# EAGLE board schematic (EAGLE 6.5.0)

Size 93 x 70 mm. Coordinates in mm from the lower left corner, seen from the top.
Outline: 0,63.65 0,6.35 arc90 6.35,0 86.65,0 arc90 93,6.35 93,63.65 arc90 86.65,70 6.35,70 arc90 0,63.65
Copper layers (1*16): Top 0.035mm / dielectric 1.5mm / Bottom 0.035mm
Design rules "default": minimum track width 10mil, minimum drill 24mil, track to track 8mil, track to pad 8mil, pad to pad 8mil, via to via 8mil, smd to smd 8mil, copper to edge 40mil, drill to drill 8mil, minimum pad ring 10mil, minimum via ring 8mil, stop-mask expansion 4mil, vias tented up to drill 0mil, thermal gap 10mil
Net classes: 0 default: width 0.152 mm, drill 0.305 mm, clearance 0.152 mm; 1 power: width 0.152 mm, drill 0.305 mm, clearance 0.152 mm; 2 gnd: width 0.152 mm, drill 0.305 mm, clearance 0.152 mm
Holes 3 mm at 4,12.6 89,12.6
Holes 5.5 mm at 89.25,58 3.75,58

## Footprints (pad centres in the part's own frame; a part is rotated, then mirrored left to right if it is on the bottom)
LIGHT-PIPE = hole 1.3: 1.214,-0.9; -1.286,-0.9
DBS = smd 1.7 x 1.9: + -2.55,-4.5; - 2.55,-4.5; AC1 -2.55,4.5; AC2 2.55,4.5
C0805 = smd 1.3 x 1.5: 1 -0.95,0; 2 0.95,0
E3,5-10 = drill 0.813 pad 1.6: + -1.778,0 | drill 0.813 pad 1.6 octagon: - 1.778,0
E5-10,5 = drill 1.016 pad 2.54: + -2.54,0 | drill 1.016 pad 2.54 octagon: - 2.54,0
0402-CAP = smd 0.7 x 0.9: 1 -0.65,0; 2 0.65,0
C0402 = smd 0.7 x 0.9: 1 -0.65,0; 2 0.65,0
E2,5-6E = drill 0.813 pad 1.778: + -1.27,0 | drill 0.813 pad 1.778 octagon: - 1.27,0
E2-5 = drill 0.813 pad 1.422: + -1.016,0 | drill 0.813 pad 1.422 octagon: - 1.016,0
E5-13 = drill 1.016 pad 2.54: + -2.54,0 | drill 1.016 pad 2.54 octagon: - 2.54,0
C0603 = smd 1 x 1.1: 1 -0.85,0; 2 0.85,0
DCJACK_2MM_PTH = drill 2.8: GND 0,7.35; GNDBREAK 4.8,10.75 | drill 3.2: PWR 0,13.6
SMC = smd 2.8 x 3.8: A 3.7,0; C -3.7,0
SMA-DIODE = smd 1.27 x 1.47: A -2.15,0; C 2.15,0
DUOLED-C-0603 = smd 0.9 x 0.4: A1 -0.825,0.43; A2 -0.825,-0.43; C1 0.825,0.43; C2 0.825,-0.43
2X08 = drill 1.016 octagon: 1 -8.89,-1.27; 2 -8.89,1.27; 3 -6.35,-1.27; 4 -6.35,1.27; 5 -3.81,-1.27; 6 -3.81,1.27; 7 -1.27,-1.27; 8 -1.27,1.27; 9 1.27,-1.27; 10 1.27,1.27; 11 3.81,-1.27; 12 3.81,1.27; 13 6.35,-1.27; 14 6.35,1.27; 15 8.89,-1.27; 16 8.89,1.27
1X04 = drill 1.016 long: 1 -3.81,0; 2 -1.27,0; 3 1.27,0; 4 3.81,0
2X06 = drill 1.016 octagon: 1 -6.35,-1.27; 2 -6.35,1.27; 3 -3.81,-1.27; 4 -3.81,1.27; 5 -1.27,-1.27; 6 -1.27,1.27; 7 1.27,-1.27; 8 1.27,1.27; 9 3.81,-1.27; 10 3.81,1.27; 11 6.35,-1.27; 12 6.35,1.27
USB-MICROB = smd 0.35 x 1.4: D+ 0,2.65; D- -0.65,2.65; GND 1.3,2.65; ID 0.65,2.65; VBUS -1.3,2.65 | smd 1.8 x 1.9: MT1 -4,0; MT2 4,0 | smd 1.9 x 1.9: P$1 -1.27,0; P$2 1.27,0
SOT223-5 = smd 0.4 x 1.8: 1 -2.54,-3; 2 -1.27,-3; 3 0,-3; 4 1.27,-3; 5 2.54,-3 | drill 0.305: GND@1 -1.8,3.9; GND@2 -0.9,3.9; GND@3 0,3.9; GND@4 0.9,3.9; GND@5 1.8,3.9; GND@6 -1.8,3; GND@7 -0.9,3; GND@8 0,3; GND@9 0.9,3; GND@10 1.8,3; GND@11 -1.8,2.1; GND@12 -0.9,2.1; GND@13 0,2.1; GND@14 0.9,2.1; GND@15 1.8,2.1 | smd 3.81 x 1.8: TAB 0,3
0402-RES = smd 0.7 x 0.9: 1 -0.65,0; 2 0.65,0
R0603 = smd 1 x 1.1: 1 -0.85,0; 2 0.85,0
R2512 = smd 1.8 x 3.2: 1 -2.8,0; 2 2.8,0
R0402 = smd 0.7 x 0.9: 1 -0.65,0; 2 0.65,0
B3F-31XX = drill 1.016 octagon: 1 -2.261,-1.245; 2 2.261,-1.245 | drill 1.499 pad 2.159: 3 -3.505,1.245; 4 3.505,1.245
B3F-10XX = drill 1.016 long: 1 -3.251,2.261; 2 3.251,2.261; 3 -3.251,-2.261; 4 3.251,-2.261
MAGJACK-POE = drill 0.89: 1 5.72,-8.89; 2 4.45,-6.35; 3 3.18,-8.89; 4 1.91,-6.35; 5 0.64,-8.89; 6 -0.63,-6.35; 7 -1.9,-8.89; 8 -3.17,-6.35; 9 -4.44,-8.89; 10 -5.71,-6.35 | drill 1.02: 11 6.625,4.08; 12 4.085,4.08; 13 -4.085,4.08; 14 -6.625,4.08 | drill 1.63: GND0 -7.745,-3.17; GND1 7.745,-3.17 | hole 3.25: -5.715,-0.12; 5.715,-0.12
PUSBMXX4-TL = smd 0.5 x 0.2: P$1 -0.75,0.5; P$2 -0.75,0; P$3 -0.75,-0.5; P$4 0.75,-0.5; P$5 0.75,0; P$6 0.75,0.5 | smd 0.4 x 1.1: P$7 0,0
SI3402 = smd 1 x 0.25: 1 -2.35,1.2; 2 -2.35,0.4; 3 -2.35,-0.4; 4 -2.35,-1.2; 11 2.35,-1.2; 12 2.35,-0.4; 13 2.35,0.4; 14 2.35,1.2 | smd 0.25 x 1: 5 -2,-2.35; 6 -1.2,-2.35; 7 -0.4,-2.35; 8 0.4,-2.35; 9 1.2,-2.35; 10 2,-2.35; 15 2,2.35; 16 1.2,2.35; 17 0.4,2.35; 18 -0.4,2.35; 19 -1.2,2.35; 20 -2,2.35 | smd 2.7 x 2.7: PAD 0,0
8PIN-SOP-8L-EP = smd 1.27 x 0.42: P$1 -3.048,1.778; P$2 -3.048,0.508; P$3 -3.048,-0.762; P$4 -3.048,-2.032; P$5 2.952,-2.032; P$6 2.952,-0.762; P$7 2.952,0.508; P$8 2.952,1.778
6-WDFN-EXPOSED-PAD = smd 0.42 x 0.42: A 0.65,0.915; C@2 0.65,-0.915; D@1 -0.65,0.915; G 0,-0.915; NC 0,0.915; S -0.65,-0.915 | smd 0.8 x 1: C@1 0.5,0; D@2 -0.5,0
SRN6045 = smd 2.5 x 6: 1 -2.175,-0.175; 2 2.125,-0.175
FIDUCIAL_1MM = smd 1 x 1: 1 0,0
SOL-PAD-OPEN = smd 2 x 2: P$1 0,0; P$2 2.31,0
INDUCTOR-10X9.8X6 = smd 3.5 x 10.2: P$1 -3.3,0; P$2 3.3,0
SKW71-SMT = smd 0.65 x 2.115: 1 0,0; 2 0,3.385; 3 -1.27,0; 4 -1.27,3.385; 5 -2.54,0; 6 -2.54,3.385; 7 -3.81,0; 8 -3.81,3.385; 9 -5.08,0; 10 -5.08,3.385; 11 -6.35,0; 12 -6.35,3.385; 13 -7.62,0; 14 -7.62,3.385; 15 -8.89,0; 16 -8.89,3.385; 17 -10.16,0; 18 -10.16,3.385; 19 -11.43,0; 20 -11.43,3.385; 21 -12.7,0; 22 -12.7,3.385; 23 -13.97,0; 24 -13.97,3.385; 25 -15.24,0; 26 -15.24,3.385; 27 -16.51,0; 28 -16.51,3.385; 29 -17.78,0; 30 -17.78,3.385; 31 -19.05,0; 32 -19.05,3.385; 33 -20.32,0; 34 -20.32,3.385; 35 -21.59,0; 36 -21.59,3.385; 37 -22.86,0; 38 -22.86,3.385; 39 -24.13,0; 40 -24.13,3.385
USB_A_VERTICAL_PTH = drill 1: 1 3.45,12.75; 2 3.45,14.75; 3 3.45,16.75; 4 3.45,18.75 | drill 1.5: P$1 0.6,12.25; P$2 6.3,12.25; P$3 6.3,19.25; P$4 0.6,19.25

## Placement (x,y rotation side)
$$U$1  LIGHT_PIPE  [LIGHT-PIPE]  39.01,65.07 0 top
$$U$2  LIGHT_PIPE  [LIGHT-PIPE]  24,65.13 0 top
$$U$3  LIGHT_PIPE  [LIGHT-PIPE]  53.95,65.07 0 top
$$U$4  LIGHT_PIPE  [LIGHT-PIPE]  69.04,65.07 0 top
B1  DBLS201G  [DBS]  86.38,28.05 270 top
C1  100nf/100V  [C0805]  67.3,34.13 135 top
C3  680uF  [E3,5-10]  76.22,49.26 90 top
C4  220uF  [E5-10,5]  86.96,49.62 0 top
C5  0.1uF  [0402-CAP]  83.97,42.98 90 top
C7  220uf  [E5-10,5]  74.67,59.98 90 top
C8  0.1uf  [C0402]  81.39,28.03 0 top
C10  10uf/100V  [E2,5-6E]  58.96,13.14 180 top
C11  2.2uf/100V  [E2-5]  64.78,13.19 0 top
C12  470uf/50V  [E5-10,5]  51.41,55.37 270 top
C13  0.1uf  [C0402]  70.61,52.67 180 top
C14  56pF  [0402-CAP]  90.68,33.68 270 top
C15  3.3nF  [C0805]  49.08,29.29 225 top
C16  150pF  [C0805]  62.78,39.07 315 top
C17  100nf/100v  [C0805]  52.79,25.7 225 top
C22  10nF  [0402-CAP]  87.33,33.68 270 top
C24  0.1uF  [0402-CAP]  66.32,29.32 135 top
C28  1000uf/10V  [E5-13]  74.37,21.64 90 top
C29  [0402-CAP]  58.87,7.16 90 top
C32  330nf/50v  [C0805]  50.69,27.65 225 top
C62  0.1u  [C0603]  33.7,49.68 270 top
C89  1uf  [C0603]  57.69,50.54 90 top
CN1  [DCJACK_2MM_PTH]  72.59,-2.39 0 top
D1  [SMC]  39.46,43.6 180 top
D3  DIODE-SCHOTTKY_  [SMA-DIODE]  88.78,36.36 180 top
D4  BA340A  [SMA-DIODE]  68.71,45.49 0 top
D5  BA340A  [SMA-DIODE]  68.71,42.25 0 top
D6  BA340A  [SMA-DIODE]  68.71,39.01 0 top
DL1  [DUOLED-C-0603]  24,66.5 90 top
DL2  [DUOLED-C-0603]  39,66.5 90 top
DL3  [DUOLED-C-0603]  54,66.5 90 top
DL4  [DUOLED-C-0603]  69,66.5 90 top
EXT  [2X08]  33.02,58.42 180 top
JP1  [1X04]  3.61,28.7 270 top
JP2  [2X06]  35.56,30.48 180 top
JP4  USB-MICROB  [USB-MICROB]  60.4,2.54 0 top
L3  [C0402]  51.51,18.96 90 top
MCP1826  mcp1826  [SOT223-5]  64.22,51.36 90 top
R1  1k  [0402-RES]  82.3,7.01 270 top
R2  10k  [0402-RES]  81.44,27 0 top
R3  1k  [0402-RES]  70.17,36.78 0 top
R4  1k  [0402-RES]  78.03,66.14 90 top
R5  [0402-RES]  21.03,65.99 90 top
R6  [0402-RES]  26.97,65.84 90 top
R7  [0402-RES]  36.12,65.99 90 top
R8  25.5K  [R0603]  63.98,26.14 315 top
R9  91k  [0402-RES]  83.52,36.88 270 top
R10  [0402-RES]  41.91,65.99 90 top
R11  [0402-RES]  51.05,65.99 90 top
R12  [0402-RES]  56.85,65.99 90 top
R13  [0402-RES]  66.14,65.99 90 top
R14  330  [0402-RES]  26.21,9.75 90 top
R15  45.3  [R0603]  65.61,27.76 315 top
R16  R1  [R0603]  50.48,33.14 135 top
R17  R2  [R0603]  61.15,37.53 315 top
R18  220R/2W  [R2512]  60.66,57.64 90 top
R19  49.9k  [R0603]  62.18,24.31 315 top
R20  [0402-RES]  71.93,65.99 90 top
R21  30K  [R0603]  50.19,23.05 225 top
R22  10K  [R0402]  70.58,53.96 180 top
R23  20k  [0402-RES]  82.45,36.88 270 top
R24  330  [0402-RES]  44.04,8.23 90 top
R25  330  [0402-RES]  24.23,9.75 270 top
R26  330  [0402-RES]  5.64,9.3 270 top
R27  [0402-RES]  70.05,47.7 180 top
R28  100k  [0402-RES]  74.22,42.82 270 top
R29  3k  [0402-RES]  89,34.29 180 top
S1  [B3F-31XX]  83.82,4.42 0 top
S2  [B3F-10XX]  83.21,63.09 270 top
U1  MAGJACK-POE  [MAGJACK-POE]  34.95,9.35 180 top
U2  MAGJACK-POE  [MAGJACK-POE]  15.51,9.35 180 top
U$3  PUSBMXX4-TL  [PUSBMXX4-TL]  45.43,12.85 180 top
U$4  SI3402  [SI3402]  58.88,32 45 top
U$5  SKY87608  [8PIN-SOP-8L-EP]  79.55,40.39 0 top
U$6  FDFMA2P857  [6-WDFN-EXPOSED-PAD]  77.72,30.48 0 top
U$7  6.8uH 0302  [SRN6045]  88.7,41.3 0 top
U$9  FIDUCIAL  [FIDUCIAL_1MM]  3.35,66.29 0 top
U$10  SOL-PAD-OPEN  [SOL-PAD-OPEN]  55.6,23.97 225 top
U$11  FIDUCIAL  [FIDUCIAL_1MM]  1.52,5.18 0 top
U$12  FIDUCIAL  [FIDUCIAL_1MM]  3.35,66.29 0 bottom
U$13  FIDUCIAL  [FIDUCIAL_1MM]  1.52,5.18 0 bottom
U$14  FIDUCIAL  [FIDUCIAL_1MM]  90.68,3.66 0 bottom
U$15  FIDUCIAL  [FIDUCIAL_1MM]  91.29,65.84 0 bottom
U$16  FIDUCIAL  [FIDUCIAL_1MM]  91.29,65.84 0 top
U$17  FIDUCIAL  [FIDUCIAL_1MM]  90.68,3.66 0 top
U$18  33uH  [INDUCTOR-10X9.8X6]  51.82,42.01 180 top
U$19  SKW71-  [SKW71-SMT]  31.75,47.65 0 top
U$28  SOL-PAD-OPEN  [SOL-PAD-OPEN]  66.04,23.81 225 top
USB1  USB_SHIELDUSB_A_VERTICAL  [USB_A_VERTICAL_PTH]  46.68,-2.3 0 top

## Library data of the parts
$$U$1-$$U$4 C62 C89 DL1-DL4 MCP1826 R8 R15-R17 R19 R21 U$4 U$6 U$10 U$18 U$19 U$28 = BaseApp
B1 = rectifier
C1 C8 C13 C15-C17 C32 = rcl
C3 C4 D3 U$3 U$5 USB1 = schematic
C5 C14 C22 C24 C29 = SparkFun-Capacitors
C7 C11 C28 CN1 R18 U$9 U$11-U$17 = adafruit
C10 C12 = adafruit2
D1 = SparkFun-DiscreteSemi
D4-D6 = SparkFun-DiscreteSemi; PROD_ID: DIO-09886
EXT JP1 JP2 = pinhead
JP4 = SparkFun-Connectors; PROD_ID: CONN-09505
L3 R1-R4 R9 R14 R23-R29 = SparkFun-Passives
R5-R7 R10-R13 R20 = SparkFun
R22 = resistor
S1 = switch-omron; MPN: B3F-3100; OC_FARNELL: 959704; OC_NEWARK: 36M3582
S2 = switch-omron; MPN: B3F-1000; OC_FARNELL: 176432; OC_NEWARK: 36M3542
U1 U2 = SparkFun-Connectors
U$7 = SparkFun-Passives; PROD_ID: NDUC-11627; VALUE: 33uH

## Nets
+2V [power]: U1.3 U1.4 U2.3 U2.4 U$19.22 U$19.24
+57 [power]: C1.2 C10.+ C11.+ C12.+ C32.2 D1.C R8.2 U$4.12 U$4.16 U$28.P$1
CMP: C14.2 C22.2 U$5.P$6
ETH0_GRN+: R19.2 R24.2
ETH0_GRN-: C10.- C11.- U1.14 U$4.7 U$4.17 U$4.19
GND: B1.- B1.AC2 C1.1 C3.- C4.- C7.- C8.2 C12.- C13.2 C14.1 C24.2 C28.- C29.2 C62.1 C89.1 CN1.GND CN1.GNDBREAK D3.A DL1.C1 DL1.C2 DL2.C1 DL2.C2 DL3.C1 DL3.C2 DL4.C1 DL4.C2 JP1.1 JP2.12 JP4.GND JP4.MT1 JP4.MT2 L3.2 MCP1826.3 MCP1826.GND@1 MCP1826.GND@2 MCP1826.GND@3 MCP1826.GND@4 MCP1826.GND@5 MCP1826.GND@6 MCP1826.GND@7 MCP1826.GND@8 MCP1826.GND@9 MCP1826.GND@10 MCP1826.GND@11 MCP1826.GND@12 MCP1826.GND@13 MCP1826.GND@14 MCP1826.GND@15 MCP1826.TAB R1.1 R2.2 R3.1 R4.1 R14.2 R15.2 R16.2 R18.1 R23.2 R26.1 R29.1 U1.GND0 U1.GND1 U2.10 U2.14 U2.GND0 U2.GND1 U$3.P$7 U$4.9 U$4.PAD U$5.P$4 U$18.P$2 U$19.2 U$19.20 U$19.26 U$19.27 U$19.39 U$19.40 USB1.4
GPIO_23: EXT.15 U$19.3
HOSTD_N: JP2.5
HOSTD_P: JP2.3
I2S_CK: EXT.13 U$19.13
I2S_MCK: EXT.7 EXT.11 U$19.9
I2S_MICIN: EXT.6 EXT.10 U$19.7
I2S_SD: EXT.8 EXT.12 U$19.11
I2S_WS: EXT.9 U$19.5
JMP_START_LED: R5.1 U$19.21
JUMPSTART: JP2.10 S1.2 U$19.25
LAN_RX+: U2.1 U$19.12
LAN_RX-: U2.2 U$19.14
LAN_TX+: U2.5 U$19.16
LAN_TX-: U2.6 U$19.18
LAN_YLW: U1.11 U$19.34
LED_A: EXT.5 R11.1
LED_B: EXT.3 R12.1
LED_C: EXT.1 R13.1
LED_D: EXT.4 R20.1
N$1: DL2.A1 R7.2
N$2: C5.2 D3.C U$5.P$2 U$7.1
N$3: DL1.A1 R5.2
N$4: DL2.A2 R10.2
N$5: R1.2 S1.1
N$6: C16.2 C17.2 R21.1 U$4.15
N$7: C15.2 C16.1 R21.2
N$8: R8.1 U$4.6
N$9: R15.1 U$4.8
N$10: R4.2 S2.3 S2.4
N$11: U$4.4 U$10.P$1
N$12: C17.1 U$4.3 U$10.P$2
N$13: C15.1 U$4.1
N$15: C32.1 U$4.2
N$16: R16.1 R17.2 U$4.20
N$17: DL3.A2 R12.2
N$18: R19.1 U$4.5
N$19: DL4.A1 R13.2
N$20: MCP1826.5 R22.2
N$22: R28.1 U$5.P$7
N$23: U2.11
N$24: R14.1 U1.12
N$25: R25.2 U2.13
N$26: C5.1 U$5.P$8
N$27: R9.1 R23.1 U$5.P$5
N$29: DL4.A2 R20.2
N$31: R26.2 U2.12
N$32: U$3.P$3
N$33: U$3.P$4
N$34: U$3.P$5
N$35: DL3.A1 R11.2
N$37: C22.1 R29.2
N$38: D1.A U$4.18 U$18.P$1
N$40: DL1.A2 R6.2
N$41: L3.1 USB1.P$3
N$44: B1.AC1 CN1.PWR
N$95: R24.1 U1.13
PAS_VDC: D5.A U2.9
PD_VDC: C28.+ D4.A R17.1 R18.2 U$28.P$2
POWER_CTRL: JP2.11 MCP1826.1 R27.2
RESET_CONFIG: JP2.9 S2.1 S2.2 U$19.23
SKW_SPI_CLK: U$19.30
SKW_SPI_MISO: U$19.28
SKW_SPI_MOSI: U$19.32
SKW_UART_RXD: EXT.14 JP1.2 U$19.37
SKW_UART_TXD: EXT.16 JP1.3 U$19.38
SP1: U1.10 U$4.11
SP2: U1.9 U$4.10
SYSTEM_LED: R6.1 U$19.19
USB_D_N: JP2.8 JP4.D-
USB_D_P: JP2.7 JP4.D+
USB_LED: R10.1 U$19.35
USBUPD1_N: JP2.6 U$3.P$1 U$19.17 USB1.2
USBUPD1_P: JP2.4 U$3.P$2 U$19.15 USB1.3
VBUS: C29.1 JP4.VBUS U$6.D@1 U$6.D@2
VCC: C24.1 JP2.2 MCP1826.2 R27.1 U$3.P$6 USB1.1
VDD: C7.+ C13.1 C62.2 C89.2 EXT.2 JP1.4 MCP1826.4 R22.1 R25.1 U$19.1 U$19.29 U$19.31
VIN: C3.+ D4.C D5.C D6.C R3.2 R28.2 U$5.P$1
VJACK: B1.+ D6.A
VSOURCE: C4.+ R2.1 R9.2 U$6.A U$6.G U$7.2
VVCC: C8.1 JP2.1 U$6.C@1 U$6.C@2 U$6.S
WAN_RX+: U1.1 U$19.4
WAN_RX-: U1.2 U$19.6
WAN_TX+: U1.5 U$19.8
WAN_TX-: U1.6 U$19.10
WAN_YLW: U$19.33
WIRELESS_LED: R7.1 U$19.36

## Tracks (layer width: path | path; a pad name or v marks a point on that pad's centre or on a via)
+2V  (5 unrouted)
+57  (9 unrouted)
CMP  (2 unrouted)
ETH0_GRN+  (1 unrouted)
ETH0_GRN-  (5 unrouted)
GND  (76 unrouted)
GPIO_23  (1 unrouted)
I2S_CK  (1 unrouted)
I2S_MCK  (2 unrouted)
I2S_MICIN  (2 unrouted)
I2S_SD  (2 unrouted)
I2S_WS  (1 unrouted)
JMP_START_LED  (1 unrouted)
JUMPSTART  (2 unrouted)
LAN_RX+  (1 unrouted)
LAN_RX-  (1 unrouted)
LAN_TX+  (1 unrouted)
LAN_TX-  (1 unrouted)
LAN_YLW  (1 unrouted)
LED_A  (1 unrouted)
LED_B  (1 unrouted)
LED_C  (1 unrouted)
LED_D  (1 unrouted)
N$1  (1 unrouted)
N$2  (3 unrouted)
N$3  (1 unrouted)
N$4  (1 unrouted)
N$5  (1 unrouted)
N$6  (3 unrouted)
N$7  (2 unrouted)
N$8  (1 unrouted)
N$9  (1 unrouted)
N$10  (2 unrouted)
N$11  (1 unrouted)
N$12  (2 unrouted)
N$13  (1 unrouted)
N$15  (1 unrouted)
N$16  (2 unrouted)
N$17  (1 unrouted)
N$18  (1 unrouted)
N$19  (1 unrouted)
N$20  (1 unrouted)
N$22  (1 unrouted)
N$24  (1 unrouted)
N$25  (1 unrouted)
N$26  (1 unrouted)
N$27  (2 unrouted)
N$29  (1 unrouted)
N$31  (1 unrouted)
N$35  (1 unrouted)
N$37  (1 unrouted)
N$38  (2 unrouted)
N$40  (1 unrouted)
N$41  (1 unrouted)
N$44  (1 unrouted)
N$95  (1 unrouted)
PAS_VDC  (1 unrouted)
PD_VDC  (4 unrouted)
POWER_CTRL  (2 unrouted)
RESET_CONFIG  (3 unrouted)
SKW_UART_RXD  (2 unrouted)
SKW_UART_TXD  (2 unrouted)
SP1  (1 unrouted)
SP2  (1 unrouted)
SYSTEM_LED  (1 unrouted)
USB_D_N  (1 unrouted)
USB_D_P  (1 unrouted)
USB_LED  (1 unrouted)
USBUPD1_N  (3 unrouted)
USBUPD1_P  (3 unrouted)
VBUS  (3 unrouted)
VCC  (5 unrouted)
VDD  (11 unrouted)
VIN  (6 unrouted)
VJACK  (1 unrouted)
VSOURCE  (5 unrouted)
VVCC  (4 unrouted)
WAN_RX+  (1 unrouted)
WAN_RX-  (1 unrouted)
WAN_TX+  (1 unrouted)
WAN_TX-  (1 unrouted)
WIRELESS_LED  (1 unrouted)